# Altium PCB GameBoy_PCB.PcbDoc
Units mm, origin at the board's own origin, x right, y up, seen from the top; angles counter-clockwise.
Board outline 49.1 x 47 mm, 2 copper layers (Top Layer, Bottom Layer), stack 1.569 mm thick; 66 components, 34 nets, 164 pads, 31 vias.
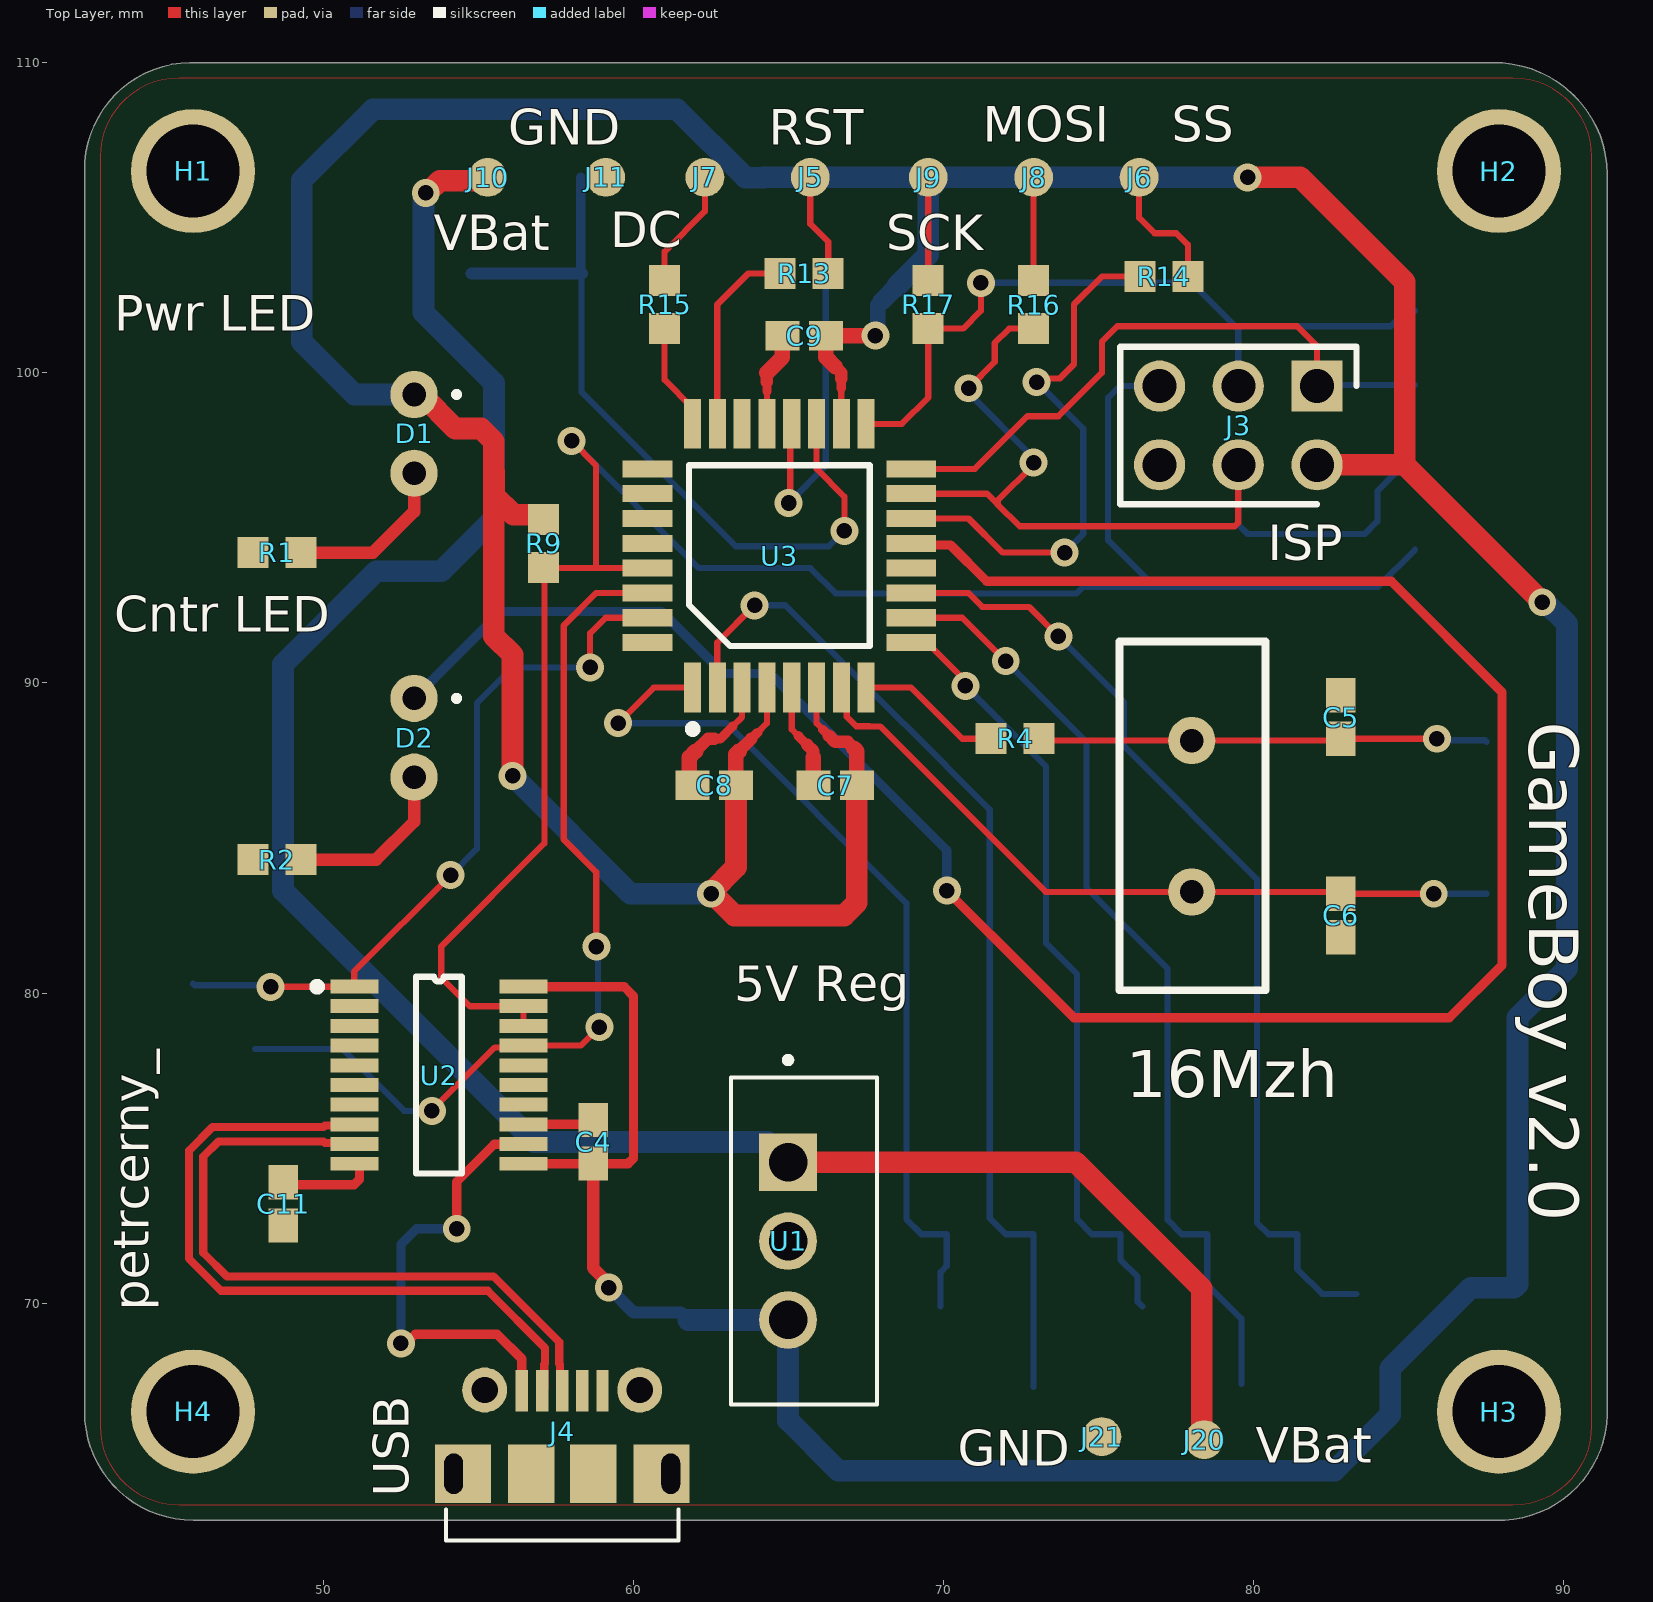
[diagram p0: Top Layer view]
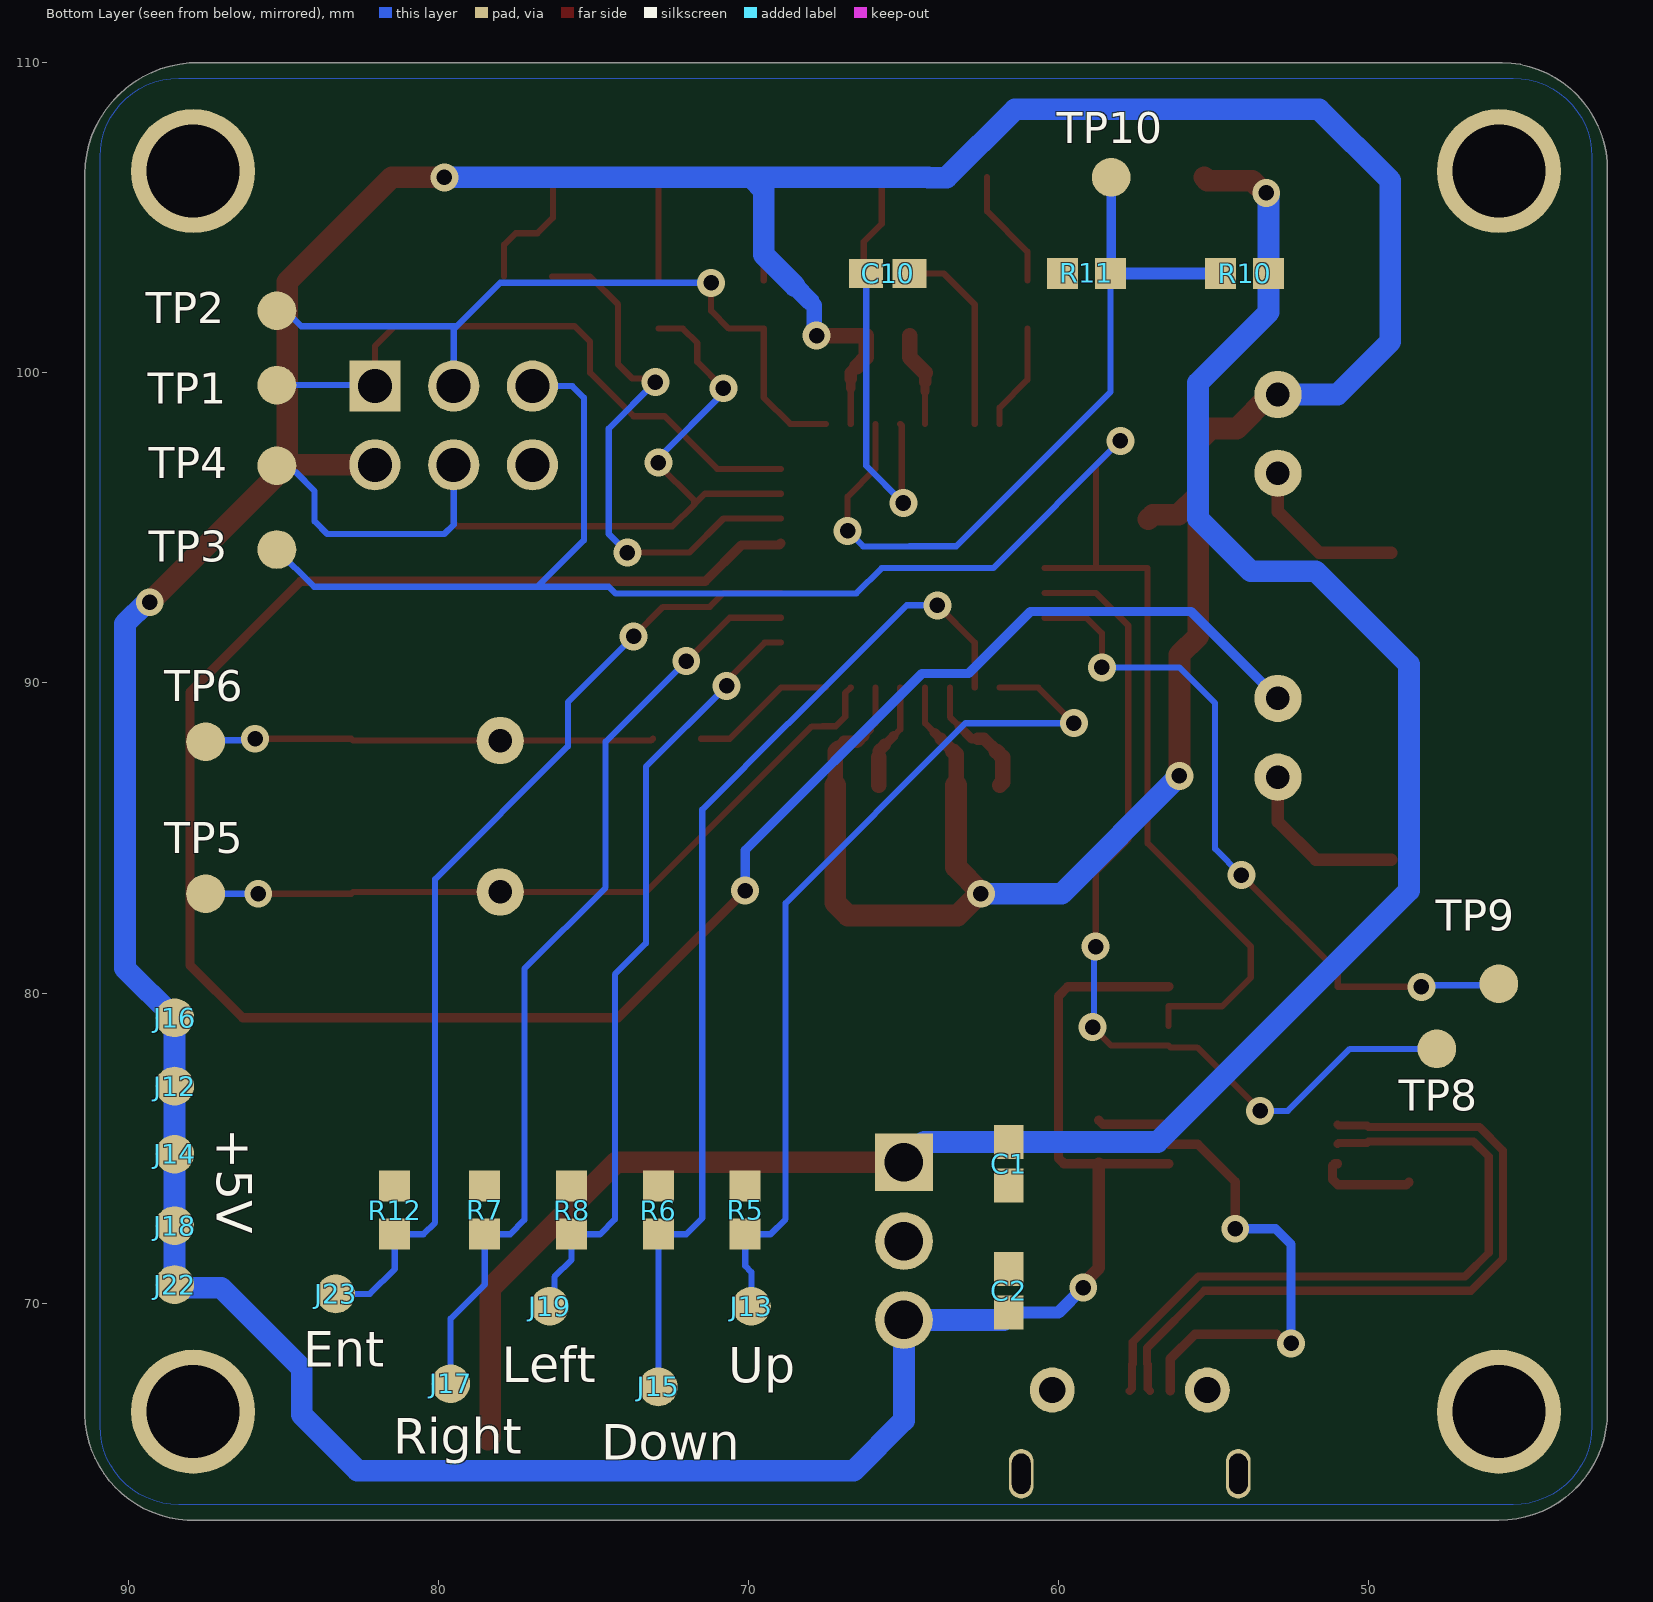
[diagram p1: Bottom Layer view, seen from below]
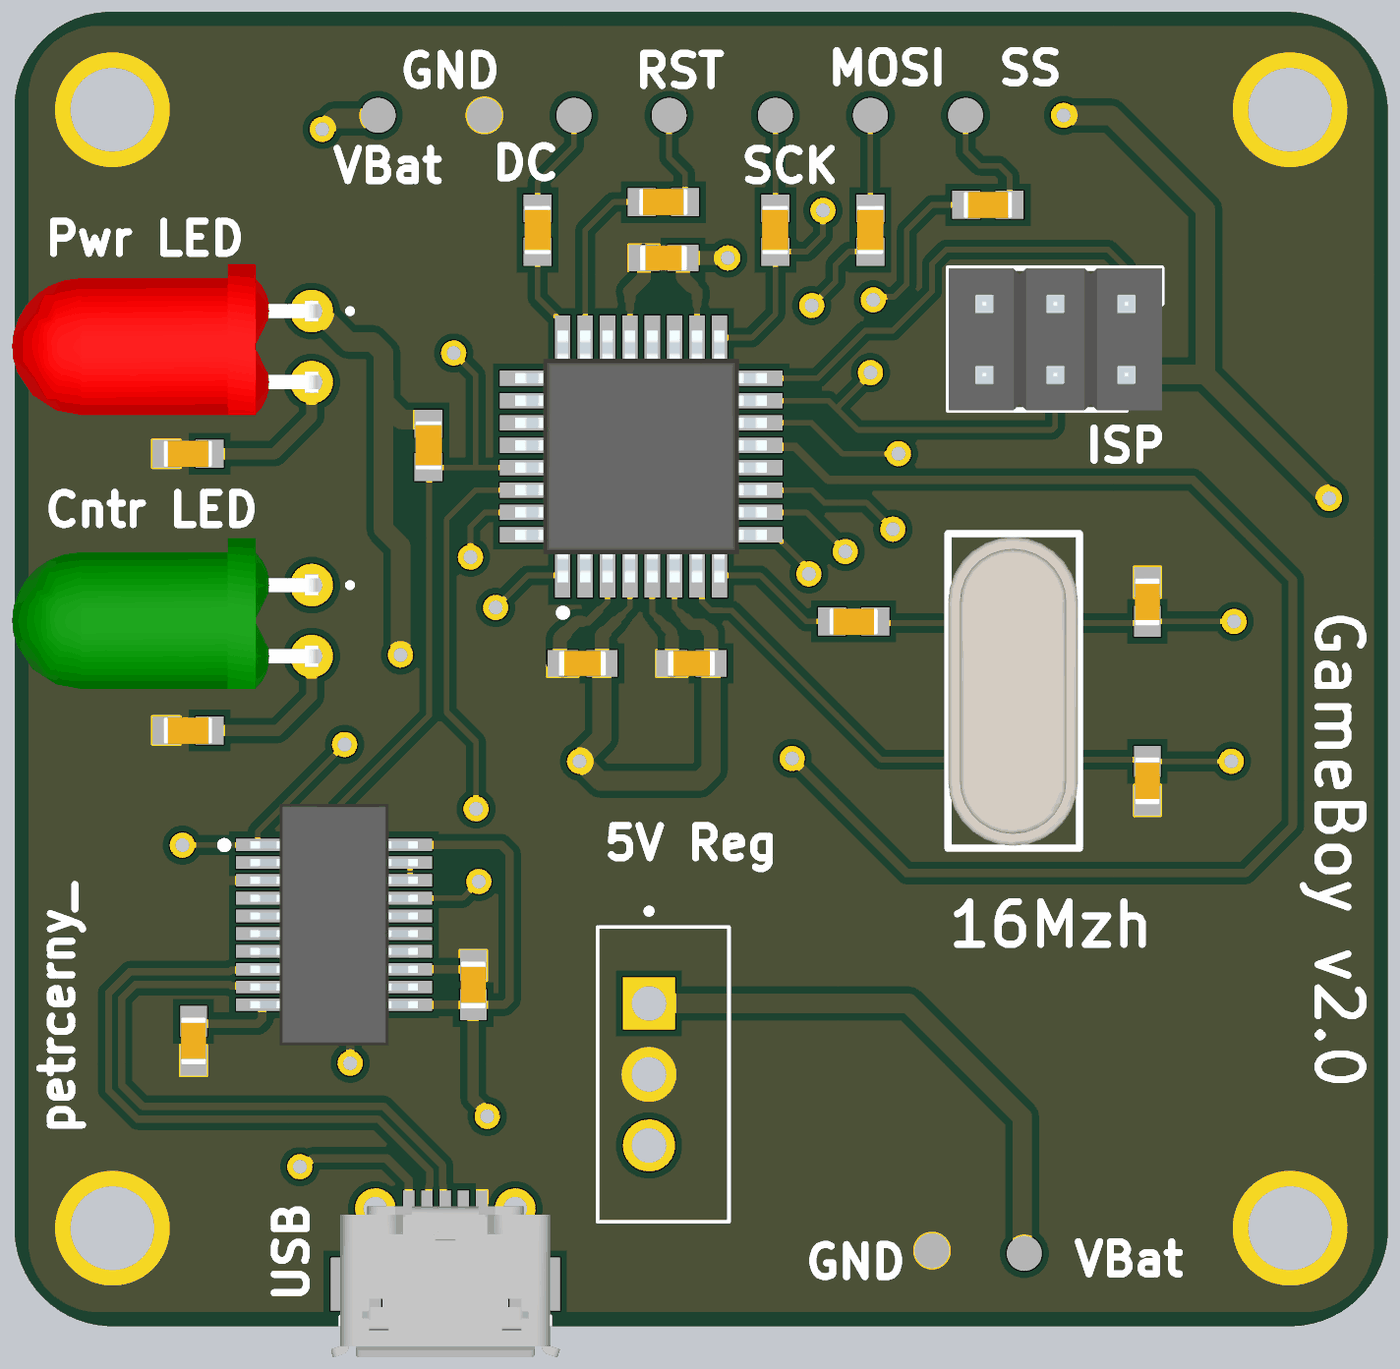
[diagram p2: 3D render of the assembled board from above, using the file's embedded part models]
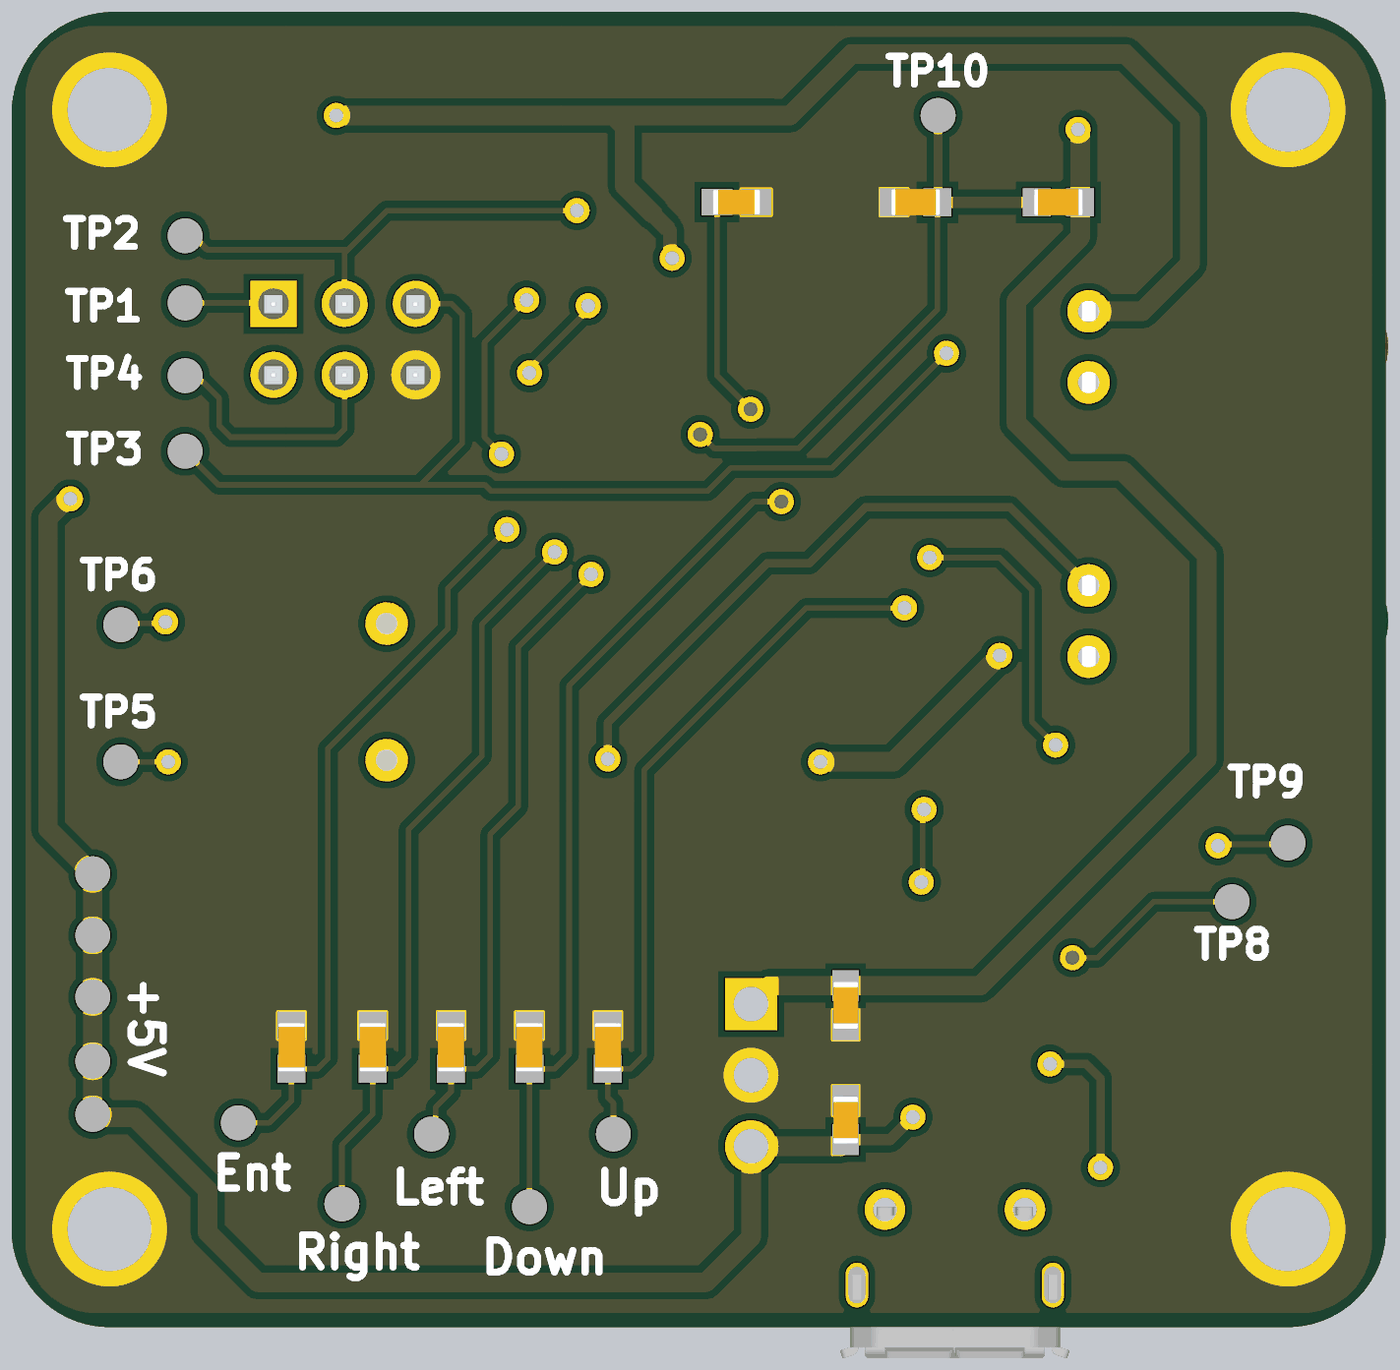
[diagram p3: 3D render of the assembled board from below, using the file's embedded part models]

## Layer stack, top to bottom
Top Solder: solder mask 0.0254, SM-001, Dk 4
Top Layer: signal copper 0.035
Dielectric 1: core 1.4986, Core-043, Dk 4.3
Bottom Layer: signal copper 0.035
Bottom Solder: solder mask 0.0254, SM-001, Dk 4

## Board outline
42.3,66.5 42.3,106.5 cw(c45.75,106.55) 45.7,110 87.7,110 cw(c87.75,106.35) 91.4,106.4 91.4,66.4 cw(c87.9,66.5) 87.8,63 45.8,63 cw(c45.8,66.5)

## Design rules (kind name [scope] priority, off if disabled: settings)
Clearance [All] p1: gap=0.25 ignorepadtopadclearanceinfootprint=TRUE except(0.2: Arc-Arc Arc-Track Track-Track; 0.3: Arc-THPad Arc-Via Arc-Hole Track-THPad Track-Via Track-Hole SMDPad-Via SMDPad-Hole THPad-Via THPad-Hole Via-Via Via-Hole Fill-Hole Poly-Hole Region-Hole Text-Hole; 0.35: SMDPad-THPad; 0.5: THPad-THPad)
DiffPairsRouting [All] p1: maxlimit=0.2 minlimit=0.2 mostfreqgap=0.2 toplayer_minwidth=0.26 toplayer_maxwidth=0.26 toplayer_prefwidth=0.26 bottomlayer_minwidth=0.26 bottomlayer_maxwidth=0.26 bottomlayer_prefwidth=0.26 impedanceprofiledriven=TRUE impedanceprofileid={4B5BA4C7-2DEF-49E6-82B4-E8630D457DB6} impedanceprofilevalue=117.000000 maxuncoupledlength=12.7
HoleSize [All] p1: absolutevalues=TRUE maxlimit=2.54 minlimit=0.3 maxpercent=80.000 minpercent=20.000
HoleToHoleClearance [All] p1: gap=0.5 allowstackedmicrovias=FALSE
MinimumAnnularRing [All] p1: minimumring=0.15
PolygonConnect [All] p1: connectstyle=Direct reliefconductorwidth=0.254 reliefentries=4 polygonreliefangle="90 Angle" airgapwidth=0.254
RoutingVias [All] p1: holewidth=0.5 width=0.9 viastyle="Through Hole" minholewidth=0.3 minwidth=0.7 maxholewidth=1 maxwidth=1.4
SolderMaskExpansion [All] p1: expansion=0.05 istentingtop=FALSE
UnRoutedNet [All] p1: checkbadconnections=TRUE
Width [All] p1: maxlimit=1 minlimit=0.13 preferedwidth=0.3 minimp=50.000000 maximp=50.000000 favimp=50.000000
26 further rules are at their usual default settings.

## Classes and differential pairs
net class USB_Diff: USB_D_N
differential pair USB_D: +USB_D_P -USB_D_N

## Components (designator, comment, footprint, x,y, rotation, side; value= is the part's Value field where it differs from the comment)
16Mzh "Crystal_Oscillator" CrystalOscillator 78,85.7 r90 top
C1 "1u" CAP_0603 61.6,74.5 r90 bottom
C2 "1u" CAP_0603 61.6,70.4 r270 bottom
C4 "100n" CAP_0603 58.7,75.2 r270 top
C5 "12p" CAP_0603 82.8,88.9 r90 top
C6 "12p" CAP_0603 82.8,82.5 r90 top
C7 "4u7" CAP_0603 66.5,86.7 r0 top
C8 "100n" CAP_0603 62.6,86.7 r0 top
C9 "100n" CAP_0603 65.5,101.2 r180 top
C10 "100n" CAP_0603 65.5,103.2 r0 bottom
C11 "100n" CAP_0603 48.7,73.2 r90 top
D1 "Red Led" RED_LED 52.924,98.03 r270 top
D2 "Green Led" GREEN_LED 52.924,88.23 r270 top
H1 "MountingHole" MountinHoleM3 45.8,106.5 r90 top
H2 "MountingHole" MountinHoleM3 87.9,106.5 r0 top
H3 "MountingHole" MountinHoleM3 87.9,66.5 r90 top
H4 "MountingHole" MountinHoleM3 45.8,66.5 r0 top
J3 "USBASP" AVR_ISP 79.5,98.3 r180 top
J4 "Micro" USB_B_Micro 57.7,65.85 r0 top
J5 "RST" Pad_2.5mm#1 65.7,106.3 r0 top
J6 "CE" Pad_2.5mm#1 76.3,106.3 r0 top
J7 "DC" Pad_2.5mm#1 62.3,106.3 r0 top
J8 "DIN" Pad_2.5mm#1 72.9,106.3 r0 top
J9 "CLK" Pad_2.5mm#1 69.5,106.3 r0 top
J10 "5V" Pad_2.5mm#1 55.3,106.3 r90 top
J11 "GND" Pad_2.5mm#1 59.1,106.3 r0 top
J12 "SolderPad" Pad_2.5mm#2 88.5,77 r90 top
J13 "SolderPad" Pad_2.5mm#1 69.9,69.9 r90 bottom
J14 "SolderPad" Pad_2.5mm#2 88.5,74.8 r90 top
J15 "SolderPad" Pad_2.5mm#1 72.9,67.3 r90 bottom
J16 "SolderPad" Pad_2.5mm#2 88.5,79.2 r90 top
J17 "SolderPad" Pad_2.5mm#1 79.6,67.4 r90 bottom
J18 "SolderPad" Pad_2.5mm#2 88.5,72.5 r90 top
J19 "SolderPad" Pad_2.5mm#1 76.4,69.9 r90 bottom
J20 "SolderPad" Pad_2.5mm#2 78.4,65.6 r90 bottom
J21 "SolderPad" Pad_2.5mm#1 75.1,65.7 r90 top
J22 "SolderPad" Pad_2.5mm#2 88.5,70.6 r90 top
J23 "SolderPad" Pad_2.5mm#1 83.3,70.3 r90 bottom
R1 "390" RES_0603 48.5,94.2 r180 top
R2 "390" RES_0603 48.5,84.3 r180 top
R4 "0" RES_0603 72.3,88.2 r180 top
R5 "10k" RES_0603 70.1,73 r270 bottom
R6 "10k" RES_0603 72.9,73 r270 bottom
R7 "10k" RES_0603 78.5,73 r270 bottom
R8 "10k" RES_0603 75.7,73 r270 bottom
R9 "10k" RES_0603 57.1,94.5 r90 top
R10 "10k" RES_0603 54,103.2 r180 bottom
R11 "5k1" RES_0603 59.1,103.2 r180 bottom
R12 "10k" RES_0603 81.4,73 r270 bottom
R13 "10k" RES_0603 65.5,103.2 r0 top
R14 "10k" RES_0603 77.1,103.1 r0 top
R15 "10k" RES_0603 61,102.2 r90 top
R16 "10k" RES_0603 72.9,102.2 r90 top
R17 "10k" RES_0603 69.5,102.2 r90 top
TP1 "TestPoint" Pad_2.5mm#1 85.2,99.6 r90 bottom
TP2 "TestPoint" Pad_2.5mm#1 85.2,102 r90 bottom
TP3 "TestPoint" Pad_2.5mm#1 85.2,94.3 r90 bottom
TP4 "TestPoint" Pad_2.5mm#1 85.2,97 r90 bottom
TP5 "TestPoint" Pad_2.5mm#1 87.5,83.2 r0 bottom
TP6 "TestPoint" Pad_2.5mm#1 87.5,88.1 r0 bottom
TP8 "TestPoint" Pad_2.5mm#1 47.8,78.2 r0 bottom
TP9 "TestPoint" Pad_2.5mm#1 45.8,80.3 r90 bottom
TP10 "TestPoint" Pad_2.5mm#1 58.3,106.3 r90 bottom
U1 "LM7805C" LM7805C 64.983,72 r270 top
U2 "FT231XS-U" SSOP-20 53.724,77.352 r0 top
U3 "ATMEGA328-AU" TQFP-32 64.7,94.1 r90 top

## Footprints (in the part's own frame and the unit in brackets; to place one, negate y for a bottom-side part, rotate by r counter-clockwise, add the part's x,y. Pads: shape width x height; smd on the part's side, far side on the other; paste and mask are expansions set on the pad)
AVR_ISP [mm]
  rect 1.65x1.65 / inner round 1.65 / far side rect 1.65x1.65 hole 1.1: 1(-2.54,-1.27)
  round 1.65 hole 1.1: 2(0,-1.27) 3(2.54,-1.27) 4(2.54,1.27) 5(0,1.27) 6(-2.54,1.27)
  silkscreen extent -3.81,-2.54 3.81,2.54, body extent -3.82,-2.53 3.8,2.55, height 8.68
CAP_0603 [mm] "CAP_0603"
  rect 1.1x0.95 smd: 1(-0.7,0) 2(0.7,0)
  body extent -0.85,-0.45 0.85,0.45, height 0.9
CrystalOscillator [mil] "Crystal Oscillator THT"
  round 60 hole 30: 1(-96.06,0) 2(96.06,0)
  silkscreen extent -221,-93 222,92, body extent -218,-92 218,92, height 138
GREEN_LED [mil]
  round 60 hole 30: 1(-50,0) 2(50,0)
  silkscreen extent -52,52 -48,56, body extent -116,-421 96,10, height 234
LM7805C [mm]
  rect 1.86x1.86 / inner round 1.86 / far side rect 1.86x1.86 hole 1.24: 1(-2.54,0)
  round 1.86 hole 1.24: 2(0,0) 3(2.54,0)
  silkscreen extent -5.94,-1.84 5.27,2.86, body extent -5,0 5,19.53, height 4.58
MountinHoleM3 [mm]
  round 4 hole 3 mask+0.05: 1(0,0)
Pad_2.5mm#1 [mm]
  round 1.25 smd mask+0.05: 1(0,0)
Pad_2.5mm#2 [mm]
  round 1.25 smd far side mask+0.05: 1(0,0)
RED_LED [mil]
  round 60 hole 30: 1(-50,0) 2(50,0)
  silkscreen extent -52,52 -48,56, body extent -116,-421 96,10, height 234
RES_0603 [mm] "RES_0603"
  rect 1x1 smd: 1(-0.775,0) 2(0.775,0)
  body extent -0.87,-0.48 0.87,0.48, height 0.55
SSOP-20 [mm]
  rect 1.55x0.45 smd mask+0.05: 1(-2.724,2.857) 2(-2.724,2.222) 3(-2.724,1.587) 4(-2.724,0.953) 5(-2.724,0.318) 6(-2.724,-0.318) 7(-2.724,-0.953) 8(-2.724,-1.587) 9(-2.724,-2.222) 10(-2.724,-2.857) 11(2.724,-2.857) 12(2.724,-2.222) 13(2.724,-1.587) 14(2.724,-0.953) 15(2.724,-0.318) 16(2.724,0.318) 17(2.724,0.953) 18(2.724,1.587) 19(2.724,2.222) 20(2.724,2.857)
  silkscreen extent -4.05,-3.17 0.74,3.17, body extent -3,-4.32 3,4.32, height 1.75
TQFP-32 [mm]
  rect 1.6x0.55 smd mask+0.05: 1(-4.25,2.8) 2(-4.25,2) 3(-4.25,1.2) 4(-4.25,0.4) 5(-4.25,-0.4) 6(-4.25,-1.2) 7(-4.25,-2) 8(-4.25,-2.8) 17(4.25,-2.8) 18(4.25,-2) 19(4.25,-1.2) 20(4.25,-0.4) 21(4.25,0.4) 22(4.25,1.2) 23(4.25,2) 24(4.25,2.8)
  rect 0.55x1.6 smd mask+0.05: 9(-2.8,-4.25) 10(-2,-4.25) 11(-1.2,-4.25) 12(-0.4,-4.25) 13(0.4,-4.25) 14(1.2,-4.25) 15(2,-4.25) 16(2.8,-4.25) 25(2.8,4.25) 26(2,4.25) 27(1.2,4.25) 28(0.4,4.25) 29(-0.4,4.25) 30(-1.2,4.25) 31(-2,4.25) 32(-2.8,4.25)
  silkscreen extent -5.71,-2.92 2.92,2.92, body extent -4.5,-4.5 4.5,4.5, height 1.2
USB_B_Micro [mm]
  rect 0.4x1.35 smd mask+0.05: 1(-1.3,1.325) 2(-0.65,1.325) 3(0,1.325) 4(0.65,1.325) 5(1.3,1.325)
  round 1.45 hole 0.85: P$1(-2.5,1.35) P$2(2.5,1.35)
  rect 1.5x1.9 smd: P$8(-1,-1.35) P$9(1,-1.35)
  rect 1.8x1.9 smd: P$10(-3.2,-1.35) P$11(3.2,-1.35)
  oval 0.8x1.6 hole 0.6 slot 1.3 at 90 deg: P$12(-3.5,-1.35) P$13(3.5,-1.35)
  silkscreen extent -3.75,-3.5 3.75,-2.5, body extent -4.1,-3.97 4.1,1.43, height 2.71

## Part data
C1 C2: library part CAP_0603_16V, "Capacitor SMD 0603 16V"
C4 C5 C6 C8 C9 C10 C11: library part CAP_0603_50V, "Capacitor SMD 0603 50V"
C7: library part CAP_0603_10V, "Capacitor SMD 0603 10V"
D1: library part RED_LED
D2: library part GREEN_LED
H1 H2 H3 H4: "Mounting Hole"
J3: library part AVR_ISP, "Programmer connector"
J4: library part "USB Micro B", "USB B Micro", Manufacturer Part=105017-0001, ComponentLink1Description=Kondik, ComponentLink1URL=https://www.kondik.cz/konektor-usb-2-0-micro-b-105017-0001/, ComponentLink2Description=Mouser, ComponentLink2URL=https://cz.mouser.com/ProductDetail/Molex/105017-0001?qs=hlXxxvYE36k7QcsR97GUKA%3D%3D, ComponentLink3Description=Datasheet, ComponentLink3URL=https://www.molex.com/content/dam/molex/molex-dot-com/products/automated/en-us/salesdrawingpdf/105/105017/1050170001_sd.pdf
J5 J6 J7 J8 J9 J10 J11: library part SolderPad, "SolderPad"
R1 R2 R4 R5 R6 R7 R8 R9 R10 R11 R12 R13 R14 R15 R16 R17: library part RES_0603, "Resistor SMD 0603"
U2: "USB to UART", ComponentLink1Description=Mouser, ComponentLink1URL=https://cz.mouser.com/ProductDetail/FTDI/FT231XS-U?qs=Gp1Yz1mis3WFP7tMtj2Z9g%3D%3D, ComponentLink2Description=Datasheet, ComponentLink2URL=https://cz.mouser.com/datasheet/2/163/DS_FT231X-13571.pdf, Manufacturer Part=FT231XS-U
U3: "MCU AVR 32K FLSH, 1K EE 2K SRAM - 20 MHz", ComponentLink1Description=Mouser, ComponentLink1URL=https://cz.mouser.com/ProductDetail/Microchip-Technology/ATMEGA328-AU?qs=lwdSMh1%2FoYJRHuGBjWz9Pg%3D%3D, ComponentLink2Description=Datasheet, ComponentLink2URL=https://cz.mouser.com/datasheet/2/268/ATmega48A_PA_88A_PA_168A_PA_328_P_DS_DS40002061B-3050139.pdf, Manufacturer=ATMEGA328-AU

## Via types
v1: diameter 0.9, hole 0.5, Top Layer to Bottom Layer, 31 vias

## Nets (pads, with @x,y where several pads share a name; then routed paths per layer and width w, separated by ;. In a path a pad name is that pad's centre, name@x,y a point inside that pad or via, vN(x,y) a via of type N, cw(c..) or ccw(c..) an arc to the next point about the centre after c; other vN are vias at no path point)
+5V: C2.2 C4.2 C7.2 C8.2 C9.1 D1.1 J3.6 J12.1 J14.1 J16.1 J18.1 J22.1 R9.2 U1.3 U2.11 U2.20 U3.4 U3.6 U3.18 | length 195.9
  Top Layer w0.2: 64,88.4 64.3,88.7 U3.4 ; U3.6 65.9,88.7 66.1,88.5 ; U3.18 66.7,99.5
  Top Layer w0.3: U2.11 58.695,74.495 C4.2 59.824,74.5 60,74.676 60,79.9 59.7,80.2 56.458,80.2 U2.20 ; 63.8,88.2 64,88.4 ; 66.1,88.5 66.3,88.3 ; 66.7,99.5 66.7,99.8
  Top Layer w0.4: C4.2@58.695,74.495 58.695,71.14 59.2,70.635 v1(59.2,70.5) ; 63.4,87.8 63.8,88.2 ; 66.3,88.3 66.5,88.1 66.9,88.1 67.1,87.9 ; 66.5,100.2 66.7,100 66.7,99.8
  Top Layer w0.5: C8.2 63.3,87.7 63.4,87.8 ; 66.5,100.2 66.2,100.5 C9.1 v1(67.8,101.2) ; 67.1,87.9 67.2,87.8 C7.2
  Top Layer w0.7: D1.1 53.147,99.3 54.247,98.2 55.083,98.2 55.493,97.79 55.493,91.507 56.1,90.9 v1(56.1,87) ; 55.5,96.8 55.5,96.056 56.131,95.425 56.95,95.425 R9.2 ; C8.2 63.3,84.054 62.5,83.254 v1(62.5,83.2) 62.554,83.2 63.254,82.5 66.79,82.5 67.2,82.91 C7.2 ; v1(79.8,106.3) 81.5,106.3 84.87,102.93 84.87,97.03 ; J3.6 84.87,97.03 ; v1(89.3,92.6) 84.87,97.03
  Bottom Layer w0.4: v1(59.2,70.5) 60,69.7 61.525,69.7 C2.2@61.765,69.46
  Bottom Layer w0.5: v1(67.8,101.2) 67.877,101.277 67.877,102.177 68,102.3
  Bottom Layer w0.6: 68,102.3 68.5,102.8
  Bottom Layer w0.7: D1.1 51,99.3 49.3,101 49.3,106.2 51.6,108.5 61.4,108.5 63.61,106.29 64.19,106.29 64.2,106.3 69.91,106.3 ; v1(56.1,87) 59.9,83.2 v1(62.5,83.2) ; C2.2@61.765,69.46 U1.3 64.983,66.217 66.6,64.6 82.6,64.6 84.4,66.4 84.4,67.9 86.995,70.495 88.395,70.495 J22.1 J18.1 J14.1 J12.1 J16.1 90.1,80.8 90.1,91.9 89.4,92.6 v1(89.3,92.6) ; 68.5,102.8 69.5,103.8 69.5,105.89 69.91,106.3 ; v1(79.8,106.3) 69.91,106.3
Button_Down: J15.1 R6.2 U3.2 | length 33.2
  Top Layer w0.2: U3.2 62.7,91.3 v1(63.9,92.5)
  Bottom Layer w0.2: v1(63.9,92.5) 64.892,92.5 68.7,88.692 68.708,88.692 71.483,85.917 71.483,72.745 72.004,72.225 R6.2 J15.1
Button_Ent: J23.1 R12.2 U3.11 | length 31.7
  Top Layer w0.2: U3.11 70.789,92.9 71.239,92.45 72.75,92.45 v1(73.7,91.5)
  Bottom Layer w0.2: v1(73.7,91.5) 75.817,89.383 75.817,87.955 80.1,83.672 80.1,72.6 80.475,72.225 R12.2 81.4,71.1 82.2,70.3 J23.1
Button_Left: J19.1 R8.2 U3.9 | length 25.3
  Top Layer w0.2: U3.9 69.475,91.3 70.7,90.075 v1(70.7,89.9)
  Bottom Layer w0.2: v1(70.7,89.9) 73.3,87.3 73.3,81.6 74.3,80.6 74.3,72.705 74.78,72.225 R8.2 75.7,71.396 76.251,70.845 76.251,70.049 J19.1
Button_Right: J17.1 R7.2 U3.10 | length 30.6
  Top Layer w0.2: U3.10 70.6,92.1 v1(72,90.7)
  Bottom Layer w0.2: v1(72,90.7) 74.6,88.1 74.6,83.399 77.218,80.782 77.218,72.682 77.675,72.225 R7.2 78.5,70.6 79.6,69.5 J17.1
Button_Up: J13.1 R5.2 U3.1 | length 28.7
  Top Layer w0.2: v1(59.5,88.7) 60.65,89.85 U3.1
  Bottom Layer w0.2: v1(59.5,88.7) 63,88.7 68.8,82.9 68.8,72.71 69.285,72.225 R5.2 70.1,71.2 69.9,71 J13.1
DC: R15.1 U3.24 | length 3.4
  Top Layer w0.2: R15.1 61,99.775 61.9,98.875 U3.24
GND: C1.1 C2.1 C4.1 C5.2 C6.1 C7.1 C8.1 C9.2 C10.1 C11.1 H1.1 H2.1 H3.1 H4.1 J3.4 J4.5 J11.1 J21.1 R1.2 R2.2 R5.1 R6.1 R7.1 R8.1 R11.1 R12.1 U1.2 U2.3 U2.13 U3.3 U3.5 U3.21 | length 12.9
  Top Layer w0.2: 63.2,88.6 63.5,88.9 U3.3 ; U3.21 64.3,99.4 ; U3.5 65.1,88.5 65.3,88.3
  Top Layer w0.3: U2.13 58.565,75.765 C4.1 ; 62.6,88.2 62.8,88.2 63.2,88.6 ; 64.3,99.4 64.3,99.7 ; 65.3,88.3 65.4,88.2 65.6,88
  Top Layer w0.4: 62,87.8 62.4,88.2 62.6,88.2 ; 64.3,99.7 64.3,100 ; 65.6,88 65.8,87.8 65.8,87.6
  Top Layer w0.5: C8.1 61.8,86.8 61.8,87.6 62,87.8 ; 64.3,100 64.8,100.5 C9.2 ; C7.1 65.8,87.6
HSE_IN: 16Mzh.1 C6.2 TP5.1 U3.7 | length 24
  Top Layer w0.2: U3.7 66.875,89.675 66.875,88.905 67.18,88.6 67.6,88.6 67.605,88.595 67.95,88.595 73.286,83.26 16Mzh.1 82.74,83.26 C6.2 v1(85.8,83.2)
  Bottom Layer w0.2: v1(85.8,83.2) TP5.1
HSE_OUT: R4.2 U3.8 | length 4.7
  Top Layer w0.2: U3.8 68.95,89.85 70.6,88.2 R4.2
LED__STATE: D2.2 R2.1 | length 5.6
  Top Layer w0.4: R2.1 51.7,84.3 52.924,85.524 D2.2
Led_Cntrl: D2.1 U3.13 | length 73
  Top Layer w0.3: U3.13 69.006,94.444 70.219,94.444 71.39,93.273 84.427,93.273 88,89.7 88,80.9 86.3,79.2 74.2,79.2 72.9,80.5 v1(70.1,83.3)
  Bottom Layer w0.3: D2.1 55.724,92.3 60.9,92.3 62.9,90.3 64.4,90.3 70.1,84.6 v1(70.1,83.3)
LED_PWR: D1.2 R1.1 | length 5.4
  Top Layer w0.4: R1.1 51.6,94.2 52.924,95.524 D1.2
MISO: J3.1 TP1.1 U3.16 | length 20.3
  Top Layer w0.2: U3.16 71,96.9 72.7,98.6 73.7,98.6 75.1,100 75.1,101 75.6,101.5 81.4,101.5 82.04,100.86 J3.1
  Bottom Layer w0.2: J3.1 82.07,99.6 TP1.1
MOSI: J3.5 R16.1 TP4.1 U3.15 | length 30.5
  Top Layer w0.2: U3.15 71.4,96.1 71.683,95.817 71.75,95.75 ; v1(70.8,99.5) 71.648,100.348 71.648,100.962 72.111,101.425 R16.1 ; v1(72.9,97.1) 72.9,97.034 71.75,95.884 71.75,95.75 ; J3.5 79.5,95.167 79.383,95.05 72.45,95.05 71.75,95.75
  Bottom Layer w0.2: v1(70.8,99.5) 70.8,99.35 72.9,97.25 v1(72.9,97.1) ; J3.5 79.5,95.1 79.8,94.8 83.578,94.8 83.983,95.206 83.983,96.183 84.599,96.799 84.999,96.799 TP4.1
Net16Mzh_2: 16Mzh.2 C5.1 R4.1 TP6.1 | length 14.5
  Top Layer w0.2: R4.1 73.135,88.14 16Mzh.2 82.74,88.14 C5.1 v1(85.9,88.2)
  Bottom Layer w0.2: v1(85.9,88.2) 85.95,88.15 87.45,88.15 TP6.1
NetC10_2: C10.2 U3.20 | length 10.5
  Top Layer w0.2: v1(65,95.8) 65.05,95.85 65.05,98.3 U3.20
  Bottom Layer w0.2: v1(65,95.8) 66.2,97 C10.2
NetC11_2: C11.2 U2.10 | length 3.2
  Top Layer w0.3: C11.2 48.784,73.816 50.989,73.816 51.165,73.992 51.165,74.42 51.09,74.495 U2.10
NetJ5_1: J5.1 R13.2 | length 3.3
  Top Layer w0.2: J5.1 65.7,104.8 66.275,104.225 R13.2
NetJ6_1: J6.1 R14.2 | length 4.3
  Top Layer w0.2: J6.1 76.3,105 76.8,104.5 77.5,104.5 77.875,104.125 R14.2
NetJ7_1: J7.1 R15.2 | length 3.9
  Top Layer w0.2: R15.2 61,103.9 62.3,105.2 J7.1
NetJ8_1: J8.1 R16.2 | length 3.3
  Top Layer w0.2: R16.2 J8.1
NetJ9_1: J9.1 R17.2 | length 3.3
  Top Layer w0.2: R17.2 J9.1
NetR10_1: R10.1 R11.2 TP10.1 U3.19 | length 25.1
  Top Layer w0.2: U3.19 65.9,96.902 66.8,96.002 v1(66.8,94.9)
  Bottom Layer w0.2: R11.2 58.325,99.375 62.7,95 63.298,94.402 64.798,94.402 64.8,94.4 66.3,94.4 v1(66.8,94.9)
  Bottom Layer w0.3: TP10.1 58.3,103.225 R11.2
  Bottom Layer w0.4: R10.1 R11.2
Reset: J3.3 R9.1 TP3.1 U2.18 U2.19 U3.29 | length 64.4
  Top Layer w0.2: U2.18 U2.19 54.725,79.575 53.8,80.5 53.8,81.5 57.125,84.825 57.125,93.7 58.787,93.7 ; v1(58,97.8) 58.787,97.013 58.787,93.7 ; U3.29 58.787,93.7
  Bottom Layer w0.2: v1(58,97.8) 62.1,93.7 65.7,93.7 66.517,92.883 74.283,92.883 74.5,93.1 76.8,93.1 ; J3.3 75.67,99.57 75.3,99.2 75.3,94.6 76.8,93.1 ; TP3.1 84,93.1 76.8,93.1
RST: R13.1 U3.23 | length 6.3
  Top Layer w0.2: U3.23 62.7,102.2 63.7,103.2 R13.1
RXD: TP8.1 U2.17 U3.30 | length 29.6
  Top Layer w0.2: v1(53.5,76.2) 53.5,76.217 55.528,78.245 56.388,78.245 U2.17 58.305,78.305 v1(58.9,78.9) ; v1(58.8,81.5) 58.8,83.9 57.75,84.95 57.75,91.85 58.8,92.9 U3.30
  Bottom Layer w0.2: TP8.1 50.6,78.2 52.6,76.2 v1(53.5,76.2) ; v1(58.8,81.5) 58.85,81.45 58.85,78.95 v1(58.9,78.9)
SCK: J3.2 R17.1 TP2.1 U3.17 | length 24.2
  Top Layer w0.2: U3.17 68.65,98.35 69.5,99.2 R17.1 70.625,101.425 71.2,102 v1(71.2,102.9)
  Bottom Layer w0.2: v1(71.2,102.9) 78,102.9 79.4,101.5 ; J3.2 79.5,101.4 79.4,101.5 ; TP2.1 84.916,102 84.416,101.5 79.4,101.5
SS: R14.1 U3.14 | length 17.6
  Top Layer w0.2: U3.14 70.8,95.3 71.9,94.2 v1(73.9,94.2) ; v1(72.999,99.701) 73.113,99.815 73.749,99.815 74.2,100.266 74.2,102.2 75.1,103.1 R14.1
  Bottom Layer w0.2: v1(72.999,99.701) 74.5,98.2 74.5,94.8 v1(73.9,94.2)
TXD: TP9.1 U2.1 U3.31 | length 23.3
  Top Layer w0.2: v1(48.3,80.2) 48.305,80.205 50.995,80.205 50.995,80.695 v1(54.1,83.8) ; v1(58.6,90.5) 58.6,91.6 59.1,92.1 U3.31
  Bottom Layer w0.2: TP9.1 45.85,80.25 48.25,80.25 v1(48.3,80.2) ; v1(54.1,83.8) 54.95,84.65 54.95,89.35 56.1,90.5 v1(58.6,90.5)
USB_D_N: J4.3 U2.9 | length 22.5
  Top Layer w0.26: U2.9 50.97,75.16 50.053,75.16 49.996,75.217 46.617,75.217 46.125,74.725 46.125,71.625 46.891,70.86 55.491,70.86 57.605,68.746 57.605,68.047 57.63,68.022 57.63,67.245 J4.3
USB_D_P: J4.2 U2.8 | length 23.3
  Top Layer w0.26: U2.8 50.97,75.735 50.053,75.735 49.996,75.677 46.427,75.677 45.665,74.916 45.665,71.435 46.7,70.4 55.3,70.4 57.145,68.555 57.145,68.047 57.12,68.022 57.12,67.245 J4.2
Vbat: C1.2 J10.1 J20.1 R10.2 U1.1 | length 69.6
  Top Layer w0.7: v1(53.3,105.8) 53.354,105.8 53.749,106.195 55.195,106.195 J10.1 ; U1.1 74.26,74.54 78.325,70.475 78.325,65.675 J20.1
  Bottom Layer w0.7: v1(53.3,105.8) 53.3,105.746 53.225,105.671 R10.2 53.225,101.952 55.5,99.677 55.5,95.3 53.8,93.6 51.7,93.6 48.7,90.6 48.7,83.3 56.8,75.2 C1.2 64.323,75.2 U1.1
VDD: J4.1 U2.12 | length 14.8
  Top Layer w0.3: v1(52.5,68.7) 52.662,68.7 52.962,69 55.6,69 56.4,68.2 J4.1 ; v1(54.3,72.4) 54.3,73.912 55.508,75.12 56.438,75.12 U2.12
  Bottom Layer w0.3: v1(52.5,68.7) 52.5,71.9 53,72.4 v1(54.3,72.4)
pads on no net: J4.4 J4.P$1 J4.P$2 J4.P$8 J4.P$9 J4.P$10 J4.P$11 J4.P$12 J4.P$13 U2.2 U2.4 U2.5 U2.6 U2.7 U2.14 U2.15 U2.16 U3.12 U3.22 U3.25 U3.26 U3.27 U3.28 U3.32

## Polygon pours and split planes (outlines as drawn)
GND on Top Layer "NONET_L01_P000" (solid, shelved, pour order 0): 88.36,63.5 ccw(c88.36,66.04) 90.9,66.04 90.9,106.96 ccw(c88.36,106.96) 88.36,109.5 45.34,109.5 ccw(c45.34,106.96) 42.8,106.96 42.8,66.04 ccw(c45.34,66.04) 45.34,63.5
GND on Bottom Layer "NONET_L02_P001" (solid, shelved, pour order 1): 42.8,66.04 ccw(c45.34,66.04) 45.34,63.5 88.36,63.5 ccw(c88.36,66.04) 90.9,66.04 90.9,106.96 ccw(c88.36,106.96) 88.36,109.5 45.34,109.5 ccw(c45.34,106.96) 42.8,106.96

## Silkscreen, mask and mechanical layers (free items; w line width, h text height)
Top Overlay:
  text "MOSI" at 71.254,107.454 h1.15
  text "SS" at 77.354,107.454 h1.15
  text "GND" at 55.954,107.354 h1.15
  text "RST" at 64.354,107.354 h1.15
  text "DC" at 59.254,104.054 h1.15
  text "VBat" at 53.554,103.954 h1.15
  text "SCK" at 68.154,103.954 h1.15
  text "Pwr LED" at 43.254,101.354 h1.15
  text "ISP" at 80.454,93.954 h1.15
  text "Cntr LED" at 43.254,91.654 h1.15
  text "GameBoy v2.0" at 88.887,88.746 h1.6 r270
  text "5V Reg" at 63.254,79.737 h1.15
  text "petrcerny_" at 44.363,69.754 h1.15 r90
  text "VBat" at 80.054,64.854 h1.15
  text "GND" at 70.454,64.754 h1.15
  text "USB" at 52.746,63.754 h1.15 r90
Bottom Overlay:
  text "+5V" at 87.146,75.646 h1.15 r90
  text "Ent" at 84.346,67.954 h1.15
  text "Left" at 77.946,67.454 h1.15
  text "Up" at 70.646,67.437 h1.15
  text "Right" at 81.446,65.137 h1.15
  text "Down" at 74.746,64.954 h1.15
Mechanical 1:
  the board outline again, w0.254